# Altium PCB Alkinoos_PCB_Final.PcbDoc
Units mil, origin at the board's own origin, x right, y up, seen from the top; angles counter-clockwise.
Board outline 1815 x 1600 mil, 2 copper layers (Top Layer, Bottom Layer); 6 components, 7 nets, 29 pads, 0 vias.
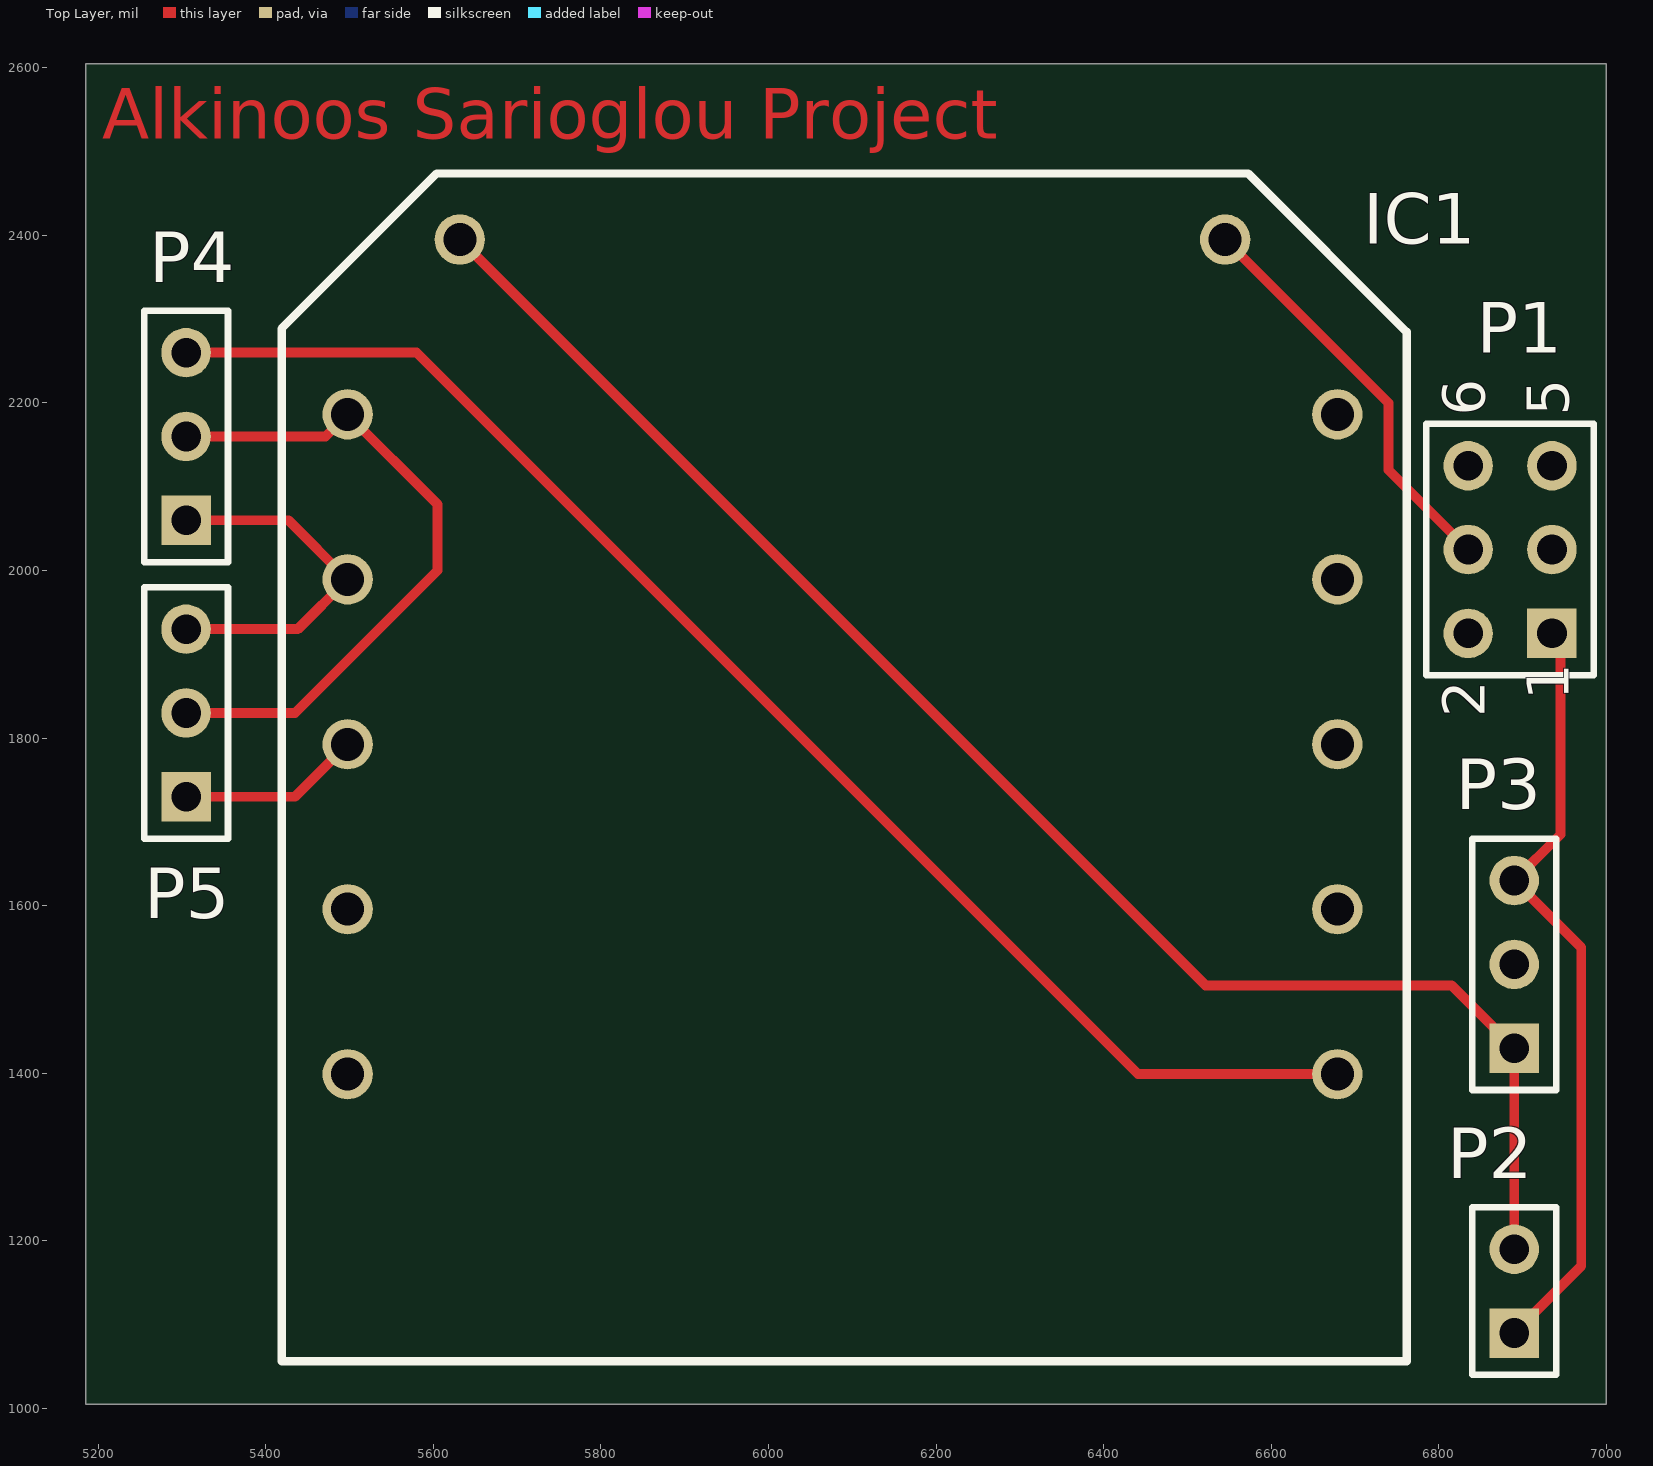
[diagram p0: Top Layer view]
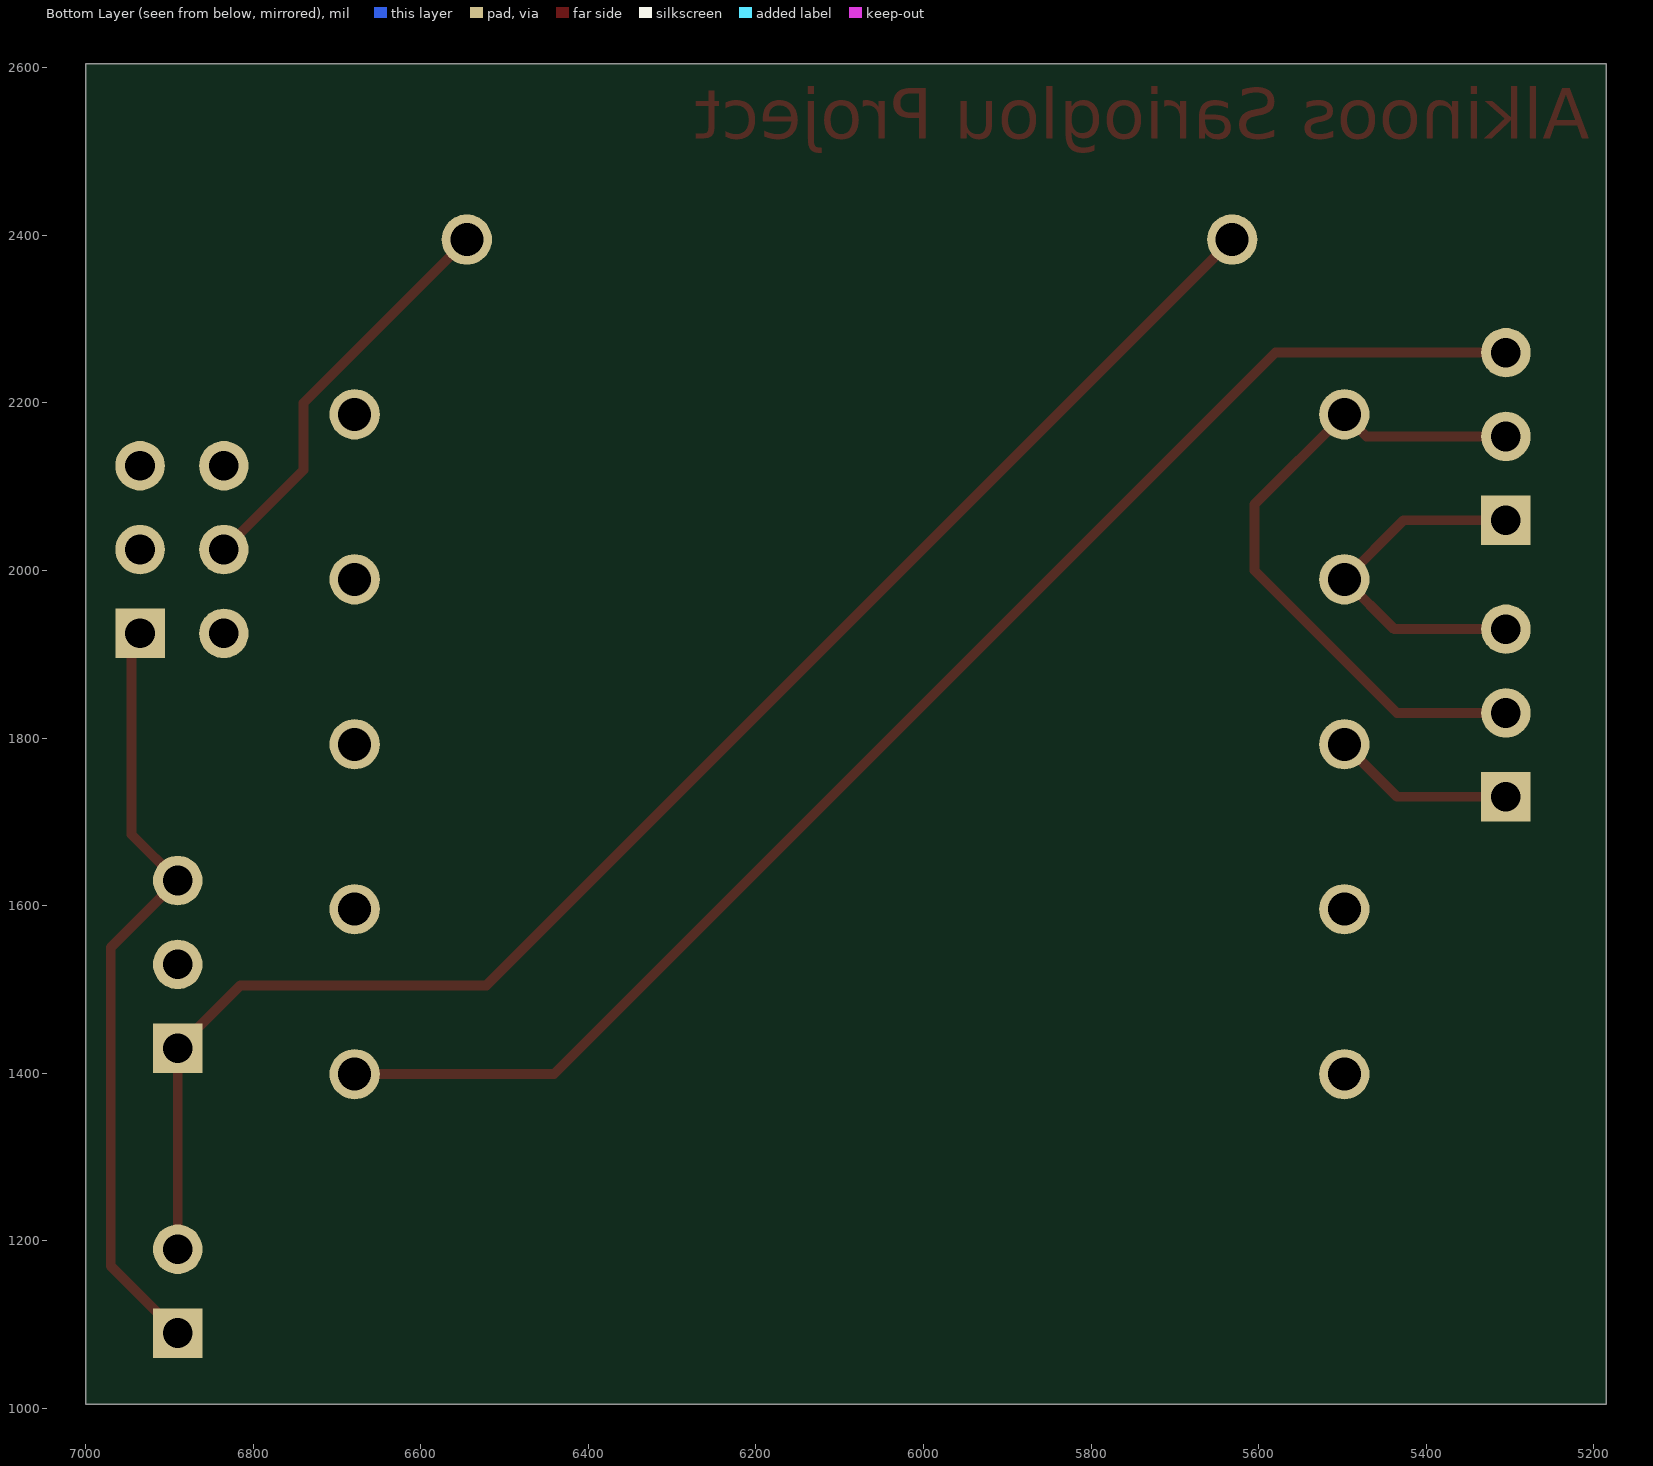
[diagram p1: Bottom Layer view, seen from below]

## Layer stack, top to bottom
Top Solder: solder mask 0.4, Solder Resist, Dk 3.5
Top Layer: signal copper 1.4
Dielectric 1: dielectric 12.6, FR-4, Dk 4.8
Bottom Layer: signal copper 1.4
Bottom Solder: solder mask 0.4, Solder Resist, Dk 3.5

## Board outline
5185,1005 7000,1005 7000,2605 5185,2605

## Design rules (kind name [scope] priority, off if disabled: settings)
Clearance [All] p1: gap=10 ignorepadtopadclearanceinfootprint=FALSE except(0: Arc-Hole Track-Hole SMDPad-Hole THPad-Hole Via-Hole Fill-Hole Poly-Hole Region-Hole Text-Hole)
DiffPairsRouting [All] p1: maxlimit=11.81 minlimit=11.81 mostfreqgap=11.81 toplayer_minwidth=11.81 toplayer_maxwidth=11.81 toplayer_prefwidth=11.81 bottomlayer_minwidth=11.81 bottomlayer_maxwidth=11.81 bottomlayer_prefwidth=11.81 maxuncoupledlength=500
HoleSize [All] p1: absolutevalues=TRUE maxlimit=236.22 minlimit=11.81 maxpercent=80.000 minpercent=20.000
PolygonConnect [All] p1: connectstyle=Relief reliefconductorwidth=10 reliefentries=4 polygonreliefangle="90 Angle" airgapwidth=10
RoutingVias [All] p1: holewidth=28 width=50 viastyle="Through Hole" minholewidth=28 minwidth=50 maxholewidth=28 maxwidth=50
SolderMaskExpansion [All] p1: expansion=4 istentingtop=FALSE
Width [All] p1: maxlimit=11.81 minlimit=11.81 preferedwidth=11.81
28 further rules are at their usual default settings.

## Classes and differential pairs
component class PCBProject: IC1 P2 P3 P4 P5

## Components (designator, comment, footprint, x,y, rotation, side; value= is the part's Value field where it differs from the comment)
IC1 "Beetle ESP32" "Beetle ESP32" 5497.76,1398.94 r180 top
P1 "Switch" HDR2X3 6935,1925 r90 top
P2 "Battery Charger" HDR1X2 6890,1090 r90 top
P3 "Battery" HDR1X3 6890,1430 r90 top
P4 "ECG Sensor" HDR1X3 5305,2060 r90 top
P5 "Heart-Rate Sensor" HDR1X3 5305,1730 r90 top

## Footprints (in the part's own frame and the unit in brackets; to place one, negate y for a bottom-side part, rotate by r counter-clockwise, add the part's x,y. Pads: shape width x height; smd on the part's side, far side on the other; paste and mask are expansions set on the pad)
"Beetle ESP32" [mm] "Beetle ESP32 Wi-Fi module"
  round 1.524 hole 1: 1(-30,0) 2(-30,-5) 3(-30,-10) 4(-30,-15) 5(-30,-20) 6(-26.6,-25.3) 7(-3.4,-25.3) 8(0,-20) 9(0,-15) 10(0,-10) 11(0,-5) 12(0,0)
  silkscreen extent -32.1,-27.3 2,8.7
HDR1X2 [mm] "Connector; Header; 2 Position"
  rect 1.5x1.5 hole 0.9: 1(0,0)
  round 1.5 hole 0.9: 2(2.54,0)
  silkscreen extent -1.27,-1.27 3.81,1.27
HDR1X3 [mm] "Connector; Header; 3 Position"
  rect 1.5x1.5 hole 0.9: 1(0,0)
  round 1.5 hole 0.9: 2(2.54,0) 3(5.08,0)
  silkscreen extent -1.27,-1.27 6.35,1.27
HDR2X3 [mm] "Connector; Header; 3x2 Position"
  rect 1.5x1.5 hole 0.9: 1(0,0)
  round 1.5 hole 0.9: 2(0,2.54) 3(2.54,0) 4(2.54,2.54) 5(5.08,0) 6(5.08,2.54)
  silkscreen extent -1.27,-1.27 6.35,3.81

## Part data
IC1: library part Component_1
P1: library part "Header 3X2", "Header, 3-Pin, Dual row"
P2: library part "Header 2", "Header, 2-Pin"
P3 P4 P5: library part "Header 3", "Header, 3-Pin"

## Nets (pads, with @x,y where several pads share a name; then routed paths per layer and width w, separated by ;. In a path a pad name is that pad's centre, name@x,y a point inside that pad or via, vN(x,y) a via of type N, cw(c..) or ccw(c..) an arc to the next point about the centre after c; other vN are vias at no path point)
NetIC1_1: IC1.1 P4.3 | length 1730.5
  Top Layer w11.81: P4.3 5580,2260 6441.06,1398.94 IC1.1
NetIC1_6: IC1.6 P1.4 | length 490.1
  Top Layer w11.81: IC1.6 6740,2200 6740,2120 P1.4
NetIC1_7: IC1.7 P2.2 P3.1 | length 1898.1
  Top Layer w11.81: IC1.7 6521.61,1505 6815,1505 P3.1 P2.2
NetIC1_8: IC1.8 P4.2 P5.2 | length 804.8
  Top Layer w11.81: P5.2 5435,1830 5605,2000 5605,2079.09 IC1.8 5471.42,2160 P4.2
NetIC1_9: IC1.9 P4.1 P5.3 | length 439.4
  Top Layer w11.81: P5.3 5438.27,1930 IC1.9 5427.24,2060 P4.1
NetIC1_10: IC1.10 P5.1 | length 218.7
  Top Layer w11.81: P5.1 5435.12,1730 IC1.10
NetP1_1: P1.1 P2.1 P3.3 | length 928.2
  Top Layer w11.81: P2.1 6970,1170 6970,1550 P3.3 6945,1685 6945,1915 P1.1
pads on no net: IC1.2 IC1.3 IC1.4 IC1.5 IC1.11 IC1.12 P1.2 P1.3 P1.5 P1.6 P3.2

## Other copper
Top Layer:
  text "Alkinoos Sarioglou Project" at 5205,2515 h60

## Text inside footprints (layer, text, board x,y; h text height)
P1: Top Overlay "1" at 6955,1845 h50 r90; Top Overlay "2" at 6855,1825 h50 r90; Top Overlay "5" at 6955,2185 h50 r90; Top Overlay "6" at 6855,2185 h50 r90